# EAGLE board LocoNet pca9685 (EAGLE 7.5.0)
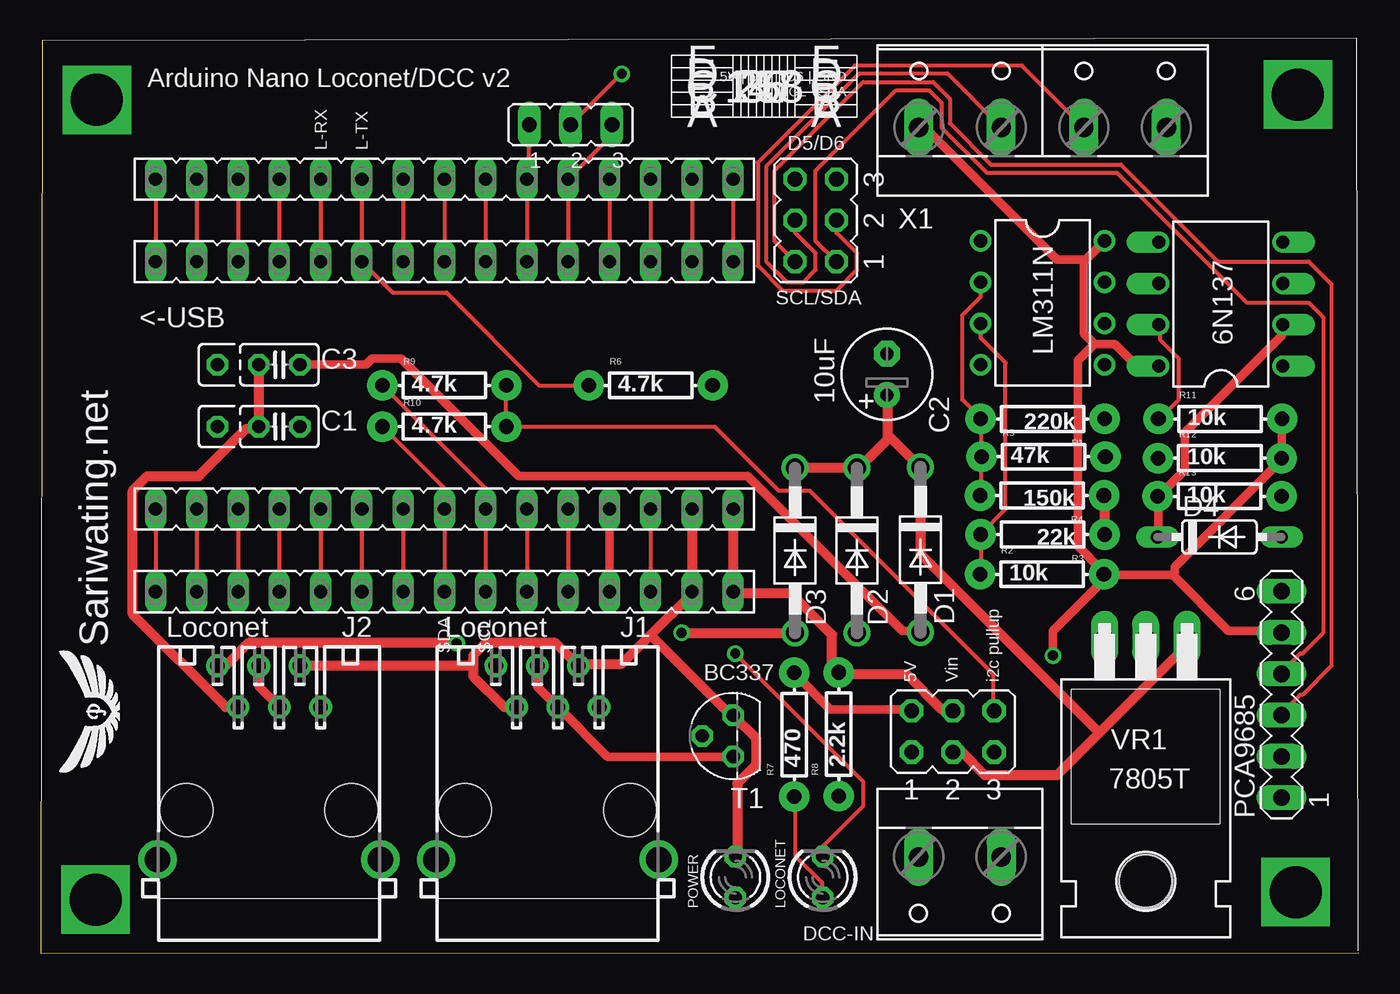
[diagram p0: board, top side]
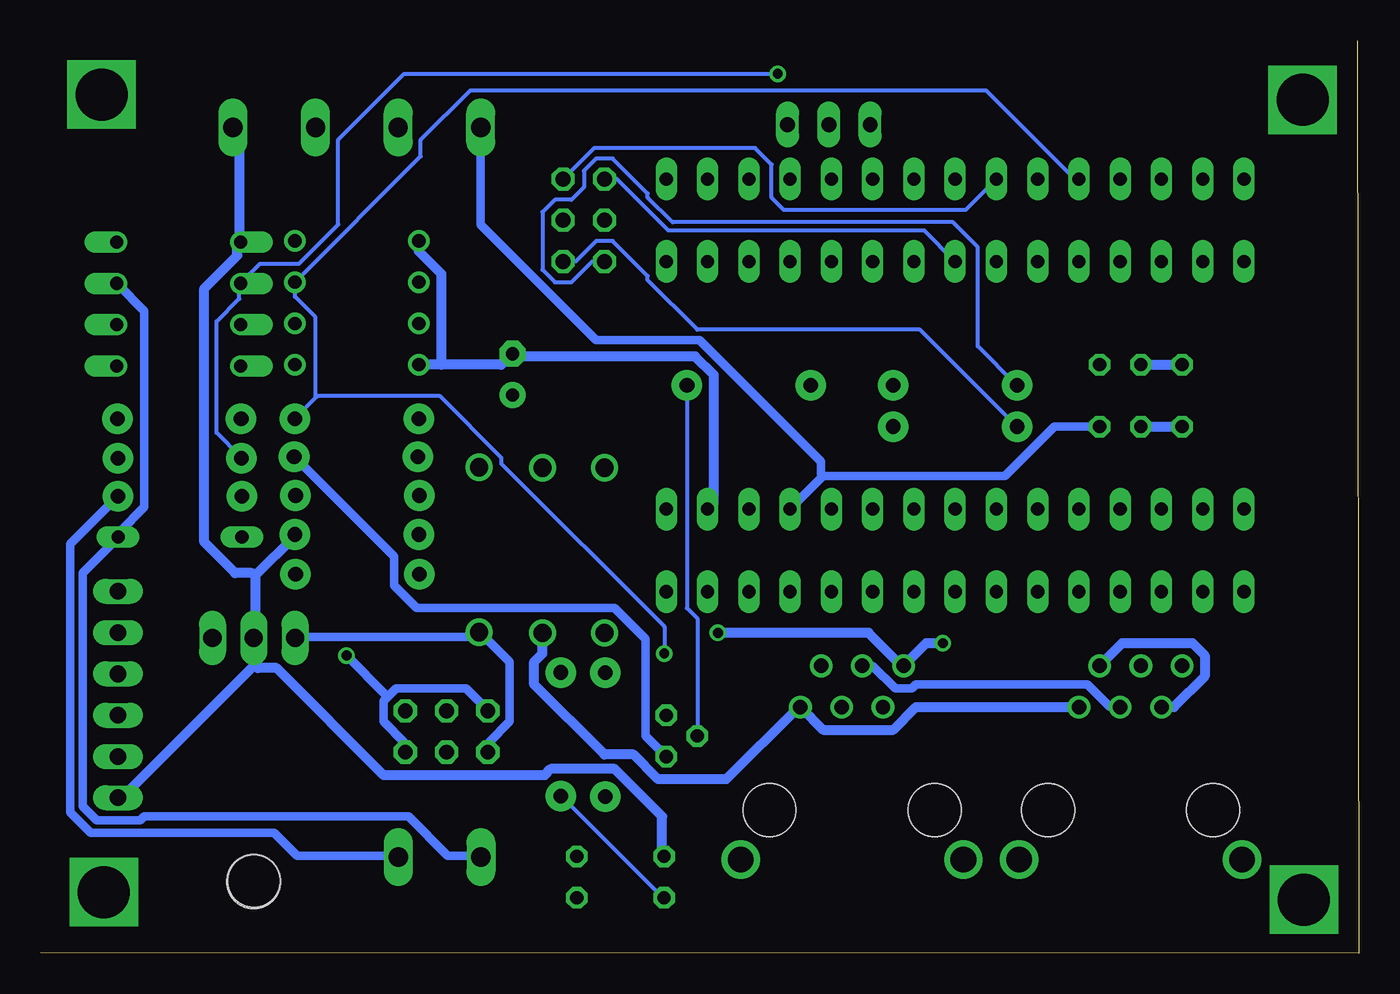
[diagram p1: board, bottom side, seen from below]

Size 81.15 x 56.19 mm. Coordinates in mm from the lower left corner, seen from the top.
Outline: 81.15,0.01 0,0 0.09,56.19
Copper layers (1*16): Top 0.035mm / dielectric 1.5mm / Bottom 0.035mm
Design rules "default *": minimum track width 10mil, minimum drill 24mil, track to track 10mil, track to pad 14mil, pad to pad 14mil, via to via 14mil, smd to smd 8mil, copper to edge 40mil, drill to drill 8mil, minimum pad ring 10mil, minimum via ring 8mil, stop-mask expansion 4mil, vias tented up to drill 0mil, thermal gap 10mil
Net classes: 0 default: width 0.254 mm; 1 ground: width 0.61 mm; 2 5v: width 0.508 mm; 3 Vin: width 0.61 mm; 4 Loconet: width 0.508 mm; 5 DCC: width 0.508 mm
Holes 3.2 mm at 68.02,4.45

## Footprints (pad centres in the part's own frame; a part is rotated, then mirrored left to right if it is on the bottom)
C025_050-025X075 = drill 0.813 octagon: 1 -1.27,0; 2 1.27,0; 3 3.81,0
E2,5-6 = drill 0.813 pad 1.6: + -1.27,0 | drill 0.813 pad 1.6 octagon: - 1.27,0
DO41-10 = drill 1.118: A 5.08,0; C -5.08,0
DO35-7 = drill 0.813 long: A 3.81,0; C -3.81,0
DIL08 = drill 0.813 offset: 1 -3.81,-3.81; 2 -1.27,-3.81; 3 1.27,-3.81; 4 3.81,-3.81; 5 3.81,3.81; 6 1.27,3.81; 7 -1.27,3.81; 8 -3.81,3.81
W237-132 = drill 1.194 long: 1 -2.54,-0.635; 2 2.54,-0.635
555140-1 = drill 0.889: 1 -3.175,8.89; 2 -1.905,6.35; 3 -0.635,8.89; 4 0.635,6.35; 5 1.905,8.89; 6 3.175,6.35 | drill 1.575 pad 2.184: G1 -6.858,-3.048; G2 6.858,-3.048 | hole 3.251: -5.08,0; 5.08,0
JP3Q = drill 0.914 octagon: 1 -2.54,-1.27; 2 -2.54,1.27; 3 0,-1.27; 4 0,1.27; 5 2.54,-1.27; 6 2.54,1.27
JP2 = drill 0.914 long: 1 -2.54,0; 2 0,0; 3 2.54,0
LED3MM = drill 0.813 octagon: A -1.27,0; K 1.27,0
MA06-1 = drill 1.016 long: 1 -6.35,0; 2 -3.81,0; 3 -1.27,0; 4 1.27,0; 5 3.81,0; 6 6.35,0
AXIAL-0.3 = drill 0.9 pad 1.88: P$1 -3.81,0; P$2 3.81,0
FE15 = drill 0.813 long: 1 -17.78,0; 2 -15.24,0; 3 -12.7,0; 4 -10.16,0; 5 -7.62,0; 6 -5.08,0; 7 -2.54,0; 8 0,0; 9 2.54,0; 10 5.08,0; 11 7.62,0; 12 10.16,0; 13 12.7,0; 14 15.24,0; 15 17.78,0
TO92 = drill 0.813 octagon: 1 1.27,0; 2 0,1.905; 3 -1.27,0
DIL08' = drill 0.813 pad 1.27: 1 -3.81,-3.81; 2 -1.27,-3.81; 3 1.27,-3.81; 4 3.81,-3.81; 5 3.81,3.81; 6 1.27,3.81; 7 -1.27,3.81; 8 -3.81,3.81
TO220H = drill 1.118 long: 1 -2.54,-10.16; 2 0,-10.16; 3 2.54,-10.16 | hole 3.302: 0,4.826
W237-4P = drill 1.194 long: 1 -7.62,-0.635; 2 -2.54,-0.635; 3 2.54,-0.635; 4 7.62,-0.635

## Placement (x,y rotation side)
C1  100nF  [C025_050-025X075]  14.69,32.42 180 top
C2  10uF  [E2,5-6]  52.1,35.64 90 top
C3  100nF  [C025_050-025X075]  14.69,36.23 180 top
D1  1N4003  [DO41-10]  54.17,24.84 270 top
D2  1N4003  [DO41-10]  50.25,24.8 270 top
D3  1N4003  [DO41-10]  46.44,24.8 270 top
D4  1N4148DO35-7  [DO35-7]  72.57,25.63 0 top
DCC  6N137  [DIL08]  72.66,39.97 90 top
DCC-IN  [W237-132]  56.59,5.3 180 top
J1  Loconet  [555140-1]  31.2,8.8 0 top
J2  Loconet  [555140-1]  14.06,8.8 0 top
JP1  [JP3Q]  56.16,13.65 0 top
JP2  DCC D3/D2  [JP2]  32.63,51.02 0 top
LOCONET  RED  [LED3MM]  48.15,4.69 90 top
PCA9685  [MA06-1]  76.39,15.93 90 top
POWER  GREEN  [LED3MM]  42.77,4.69 90 top
R1  220k  [AXIAL-0.3]  61.68,32.89 180 top
R2  10k  [AXIAL-0.3]  61.65,23.33 0 top
R3  22k  [AXIAL-0.3]  61.68,25.78 180 top
R4  150k  [AXIAL-0.3]  61.65,28.18 180 top
R5  47k  [AXIAL-0.3]  61.73,30.57 0 top
R6  4.7k  [AXIAL-0.3]  37.55,34.96 0 top
R7  470  [AXIAL-0.3]  46.39,13.46 90 top
R8  2.2k  [AXIAL-0.3]  49.14,13.47 90 top
R9  4.7k  [AXIAL-0.3]  24.85,34.96 0 top
R10  4.7k  [AXIAL-0.3]  24.85,32.42 0 top
R11  10k  [AXIAL-0.3]  72.62,32.89 0 top
R12  10k  [AXIAL-0.3]  72.59,30.48 0 top
R13  10k  [AXIAL-0.3]  72.58,28.13 0 top
SCL/SDA  [JP3Q]  47.71,45.12 90 top
SDA  [FE15]  24.85,22.26 180 top
SV1  [FE15]  24.85,47.66 180 top
SV2  [FE15]  24.85,42.58 180 top
SV3  [FE15]  24.85,27.34 180 top
T1  BC337  [TO92]  42.63,13.37 90 top
U1  LM311N  [DIL08']  61.68,40.04 270 top
VR1  7805T  [TO220H]  68.03,9.25 180 top
X1  [W237-4P]  61.68,51.47 0 top

## Library data of the parts
C1-C3 = rcl
D1-D4 = diode
DCC = optocoupler; MPN: 6N137; OC_FARNELL: 1328376; OC_NEWARK: 52M1895
DCC-IN X1 = con-wago-508; OC_FARNELL: unknown; OC_NEWARK: unknown
J1 J2 = con-amp
JP1 JP2 SCL/SDA = jumper
LOCONET POWER = led
PCA9685 = con-lstb; OC_FARNELL: unknown; OC_NEWARK: unknown
R1-R13 = SparkFun-Resistors
SDA SV1-SV3 = con-lsta; OC_FARNELL: unknown; OC_NEWARK: unknown
T1 = transistor
U1 VR1 = linear

## Nets
+5V [5v]: C1.1 DCC.8 JP1.2 JP1.5 PCA9685.5 R2.P$2 R7.P$2 R11.P$2 R12.P$2 SDA.4 SV3.4 U1.8 X1.1
ARDUINO-DCC: DCC.6 JP2.2 R12.P$1
GND [ground]: C1.2 C2.- C3.2 DCC.5 J1.2 J1.5 J2.2 J2.5 PCA9685.1 POWER.K R3.P$1 R4.P$1 SDA.2 SV3.2 T1.1 U1.1 U1.4 VR1.2 X1.4
L-RX: LOCONET.K R1.P$1 SV1.11 SV2.11 U1.7
L-TX: R6.P$1 SV1.10 SV2.10
N$1 [Vin]: D3.A J1.1 J2.1
N$2 [Vin]: D2.A J1.6 J2.6
N$3: JP1.6 R9.P$2 R10.P$2
N$4 [5v]: C3.1 D1.A JP1.1 VR1.3
N$5: POWER.A R8.P$1
N$6 [Vin]: C2.+ D1.C D2.C D3.C JP1.3 VR1.1
N$7: LOCONET.A R7.P$1
N$8: R6.P$2 T1.2
N$9 [Loconet]: J1.3 J1.4 J2.3 J2.4 R5.P$2 T1.3
N$10: R1.P$2 R4.P$2 R5.P$1 U1.2
N$11: R2.P$1 R3.P$2 U1.3
N$14: SDA.3 SV3.3
N$16: SDA.5 SV3.5
N$17: SDA.6 SV3.6
N$18: SCL/SDA.4 X1.2
N$20: SDA.9 SV3.9
N$21: SDA.10 SV3.10
N$22: SDA.11 SV3.11
N$23: SDA.12 SV3.12
N$24: SDA.13 SV3.13
N$25: SDA.14 SV3.14
N$26: SDA.15 SV3.15
N$27: SV1.1 SV2.1
N$28: SV1.2 SV2.2
N$29: SV1.3 SV2.3
N$30: SV1.4 SV2.4
N$33: SV1.7 SV2.7
N$36: SCL/SDA.3 X1.3
N$37 [DCC]: D4.C DCC.2 R13.P$1
N$38: SV1.12 SV2.12
N$39: SV1.13 SV2.13
N$40: SV1.14 SV2.14
N$41: SV1.15 SV2.15
N$42 [DCC]: D4.A DCC-IN.2 DCC.3
N$43: DCC.7 R11.P$1
N$45 [DCC]: DCC-IN.1 R13.P$2
PIN2: JP2.3 SV1.5 SV2.5
PIN3: JP2.1 SV1.6 SV2.6
PIN5: SCL/SDA.6 SV1.8 SV2.8
PIN6: SCL/SDA.5 SV1.9 SV2.9
SCL: PCA9685.3 R9.P$1 SCL/SDA.2 SDA.7 SV3.7
SDA: PCA9685.4 R10.P$1 SCL/SDA.1 SDA.8 SV3.8
V+ [Vin]: JP1.4 R8.P$2 SDA.1 SV3.1

## Tracks (layer width: path | path; a pad name or v marks a point on that pad's centre or on a via)
+5V  (via drill 0.61)
  Top 0.508: JP1.2 53.56,15.02 48.6,15.02 46.44,17.18 R7.P$2 | R11.P$2 76.42,32.8 76.42,30.52 R12.P$2 76.29,30.26 69.81,23.79 69.81,23.41 69.68,23.28 | 69.68,23.28 73.11,19.85 76.29,19.85 PCA9685.5 | 69.68,23.28 65.49,23.28 R2.P$2 | v62.32,18.33 62.32,19.85 65.49,23.03 R2.P$2 | SV3.4 SDA.4 | 64.86,37.5 66.13,37.5 67.4,36.23 68.8,36.23 DCC.8 | 64.86,37.5 64.22,38.14 64.22,42.58 | U1.8 64.22,42.58 | X1.1 54.44,50.84 62.57,42.71 64.1,42.71 64.22,42.58 | R2.P$2 65.37,23.53 63.84,25.06 63.84,36.49 64.73,37.38 64.86,37.5
  Bottom 0.508: 59.78,15.79 59.27,16.29 54.95,16.29 53.68,15.02 JP1.2 | 59.78,15.79 60.03,15.53 60.03,14.26 58.76,12.99 58.76,12.48 JP1.5 | v62.32,18.33 59.91,15.91 59.78,15.79 | C1.1 18.76,32.42 21.81,29.38 32.98,29.38 | SV3.4 32.98,29.38 | X1.1 54.06,44.87 46.95,37.76 40.6,37.76 33.11,30.26 33.11,29.5 32.98,29.38
ARDUINO-DCC  (via drill 0.61)
  Top 0.254: v35.78,54.14 32.73,51.09 JP2.2
  Bottom 0.254: R12.P$1 68.8,30.52 70.32,32.04 70.32,38.9 68.92,40.3 68.92,41.19 DCC.6 68.8,41.31 67.65,42.46 65.24,42.46 62.83,44.87 62.83,50.08 58.76,54.14 v35.78,54.14
GND
  Top 0.61: R3.P$1 65.49,25.82 65.49,28.11 R4.P$1 | C3.2 C1.2 13.17,32.3 12.66,32.3 9.74,29.38 6.57,29.38 5.68,28.49 5.68,20.87 11.39,15.15 J2.2 | POWER.K 42.89,6.01 42.89,10.45 44.03,11.6 44.03,13.25 T1.1 42.38,14.77 37.68,19.47 37.55,19.6 | SV3.2 SDA.2 39.97,22.01 37.55,19.6 | J1.2 28.54,15.15 26.63,17.06 26.63,17.69 | 26.63,17.69 26.63,18.33 27.39,19.09 31.71,19.09 J1.5 33.36,17.82 35.78,17.82 37.55,19.6 | J2.5 26.38,17.69 26.63,17.69
  Bottom 0.61: X1.4 68.92,50.46 68.92,43.85 DCC.5 69.05,43.6 69.05,42.96 71.08,40.93 71.08,25.31 69.18,23.41 68.16,23.41 67.91,23.28 | 68.03,17.69 76.03,9.69 76.29,9.69 PCA9685.1 | 68.03,17.69 68.03,19.34 VR1.2 67.91,19.6 67.91,23.28 | 67.91,23.28 65.49,25.69 R3.P$1 | J2.2 11.39,15.15 9.49,17.06 9.49,18.33 10.25,19.09 14.57,19.09 J2.5 | 56.48,36.23 52.79,36.23 52.16,36.87 C2.- 51.9,36.74 40.86,36.74 39.71,35.6 39.71,27.72 SV3.2 | 56.48,36.23 U1.4 | U1.1 57.87,43.22 56.48,41.82 56.48,36.49 56.48,36.23 | 68.03,17.69 67.78,17.56 66.64,17.56 60.03,10.96 50.13,10.96 49.75,11.34 45.81,11.34 42.89,8.42 42.89,6.01 POWER.K
L-RX  (via drill 0.61)
  Top 0.254: SV1.11 SV2.11 | v42.76,18.45 50.63,10.58 50.63,9.06 48.22,6.64 48.22,6.01 LOCONET.K
  Bottom 0.254: v42.76,18.45 42.76,20.1 52.79,30.14 52.79,30.52 56.6,34.33 64.1,34.33 64.16,34.26 | 64.16,34.26 65.49,32.93 R1.P$1 | 64.16,34.26 64.22,34.33 64.22,39.15 65.49,40.42 U1.7 57.75,49.06 57.75,50.08 54.7,53.12 22.95,53.12 17.49,47.66 SV1.11
L-TX
  Top 0.254: SV1.10 SV2.10 21.68,40.68 24.98,40.68 30.7,34.96 R6.P$1
N$1  (via drill 0.61)
  Top 0.61: J2.1 11.39,17.69 12.79,19.09 v25.62,19.09 | v39.46,19.72 D3.A
  Bottom 0.61: v25.62,19.09 26.63,19.09 J1.1 28.28,17.82 30.19,19.72 v39.46,19.72
N$2
  Bottom 0.61: J2.6 27.27,15.15 28.66,13.75 32.98,13.75 J1.6 34.63,15.02 38.95,10.71 43.14,10.71 44.67,12.23 46.44,12.23 50.76,16.55 50.76,17.95 50.25,18.45 D2.A
N$3
  Top 0.254: JP1.6 58.64,15.02 58.64,17.18 47.33,28.49 45.43,28.49 41.49,32.42 R10.P$2 R9.P$2
N$4
  Top 0.508: C3.1 20.03,36.23 20.41,36.61 22.19,36.61 29.43,29.38 43.52,29.38 53.05,19.85 54.06,19.85 D1.A
  Bottom 0.508: JP1.1 53.56,12.48 53.56,12.99 52.29,14.26 52.29,17.95 54.06,19.72 D1.A 54.32,19.6 54.44,19.47 65.49,19.47 VR1.3
N$5
  Bottom 0.254: POWER.A 42.89,3.47 49.11,9.69 R8.P$1
N$6
  Top 0.61: D3.C D2.C 50.51,30.01 52.16,31.66 52.16,31.92 | 52.16,31.92 52.16,34.33 C2.+ | 52.16,31.92 54.06,30.01 D1.C 54.19,29.63 54.19,24.55 64.99,13.75 65.18,13.56 | 65.18,13.56 70.57,18.96 70.57,19.34 VR1.1 | 65.18,13.56 62.57,10.96 58.13,10.96 56.73,12.36 56.22,12.36 JP1.3
N$7
  Top 0.254: LOCONET.A 48.09,3.47 48.09,4.36 46.44,6.01 46.44,9.56 R7.P$1
N$8
  Bottom 0.254: T1.2 40.73,20.61 41.36,21.25 R6.P$2
N$9
  Top 0.508: J2.3 13.42,16.42 J2.4 | T1.3 34.89,12.1 J1.4 31.71,15.28 30.57,16.42 J1.3
  Bottom 0.508: T1.3 43.9,13.37 43.9,19.34 45.81,21.25 58,21.25 59.4,22.64 59.4,24.42 65.49,30.52 R5.P$2 | J2.4 15.33,15.15 16.73,16.55 27.27,16.55 27.52,16.29 28.54,16.29 29.93,17.69 J1.3
N$10
  Top 0.254: R4.P$2 57.87,28.23 57.87,30.52 R5.P$1 57.87,30.65 57.87,32.8 R1.P$2 57.87,32.93 56.73,34.07 56.73,39.28 57.87,40.42 U1.2
N$11
  Top 0.254: U1.3 57.87,37.88 59.4,36.36 59.4,27.34 57.87,25.82 R3.P$2 57.87,25.69 57.87,23.41 R2.P$1
N$12  (via drill 3.2 pad 3.81)
  other vias: 77.25,3.76
N$13  (via drill 3.2 pad 3.81)
  other vias: 3.47,52.54
N$14
  Top 0.254: SV3.3 SDA.3
N$15  (via drill 3.2 pad 3.81)
  other vias: 77.41,52.86
N$16
  Top 0.254: SV3.5 SDA.5
N$17
  Top 0.254: SV3.6 SDA.6
N$18
  Top 0.254: SCL/SDA.4 46.44,44.36 47.71,43.09 47.71,42.08 46.95,41.31 45.94,41.31 44.67,42.58 44.67,48.43 50.38,54.14 55.84,54.14 X1.2
N$20
  Top 0.254: SV3.9 SDA.9
N$21
  Top 0.254: SV3.10 SDA.10
N$22
  Top 0.254: SV3.11 SDA.11
N$23
  Top 0.254: SV3.12 SDA.12
N$24
  Top 0.254: SV3.13 SDA.13
N$25
  Top 0.254: SV3.14 SDA.14
N$26
  Top 0.254: SV3.15 SDA.15
N$27
  Top 0.254: SV1.1 SV2.1
N$28
  Top 0.254: SV1.2 SV2.2
N$29
  Top 0.254: SV1.3 SV2.3
N$30
  Top 0.254: SV1.4 SV2.4
N$33
  Top 0.254: SV1.7 SV2.7
N$36
  Top 0.254: SCL/SDA.3 48.98,44.36 50.25,43.09 50.25,42.08 48.98,40.81 45.68,40.81 44.16,42.33 44.16,48.68 50.13,54.65 60.41,54.65 X1.3
N$37
  Top 0.508: D4.C 68.8,25.69 68.8,28.11 R13.P$1 68.92,28.23 70.45,29.76 70.45,32.04 76.42,38.01 76.42,38.65 DCC.2
N$38
  Top 0.254: SV1.12 SV2.12
N$39
  Top 0.254: SV1.13 SV2.13
N$40
  Top 0.254: SV1.14 SV2.14
N$41
  Top 0.254: SV1.15 SV2.15
N$42
  Bottom 0.508: DCC.3 76.42,41.19 74.76,39.54 74.76,27.47 76.29,25.95 76.29,25.69 D4.A 76.54,25.44 78.57,23.41 78.57,9.06 77.69,8.17 75.02,8.17 74.76,8.42 58.51,8.42 56.1,6.01 54.06,6.01 DCC-IN.2
N$43
  Top 0.254: DCC.7 68.92,38.65 68.92,37.76 70.07,36.61 70.07,34.07 68.92,32.93 R11.P$1
N$45
  Bottom 0.508: DCC-IN.1 59.14,6.01 65.37,6.01 66.76,7.4 78.07,7.4 79.34,8.67 79.34,25.18 76.42,28.11 R13.P$2
N$177  (via drill 3.2 pad 3.81)
  other vias: 3.38,3.3
PIN2
  Top 0.254: SV2.5 SV1.5 35.14,50.33 35.14,50.97 JP2.3
PIN3
  Top 0.254: SV2.6 SV1.6 30.06,47.79 30.06,50.97 JP2.1
PIN5
  Top 0.254: SV1.8 SV2.8
  Bottom 0.254: SCL/SDA.6 45.68,47.66 42.51,44.49 26.76,44.49 SV2.8
PIN6
  Top 0.254: SV1.9 SV2.9
  Bottom 0.254: SCL/SDA.5 47.08,49.57 37.17,49.57 36.16,48.55 36.16,46.52 35.39,45.76 24.22,45.76 SV1.9
SCL
  Top 0.254: SDA.7 SV3.7 27.39,28.61 R9.P$1 | SCL/SDA.2 45.17,43.85 45.17,48.17 50.63,53.63 54.95,53.63 55.97,52.62 55.97,51.09 58.51,48.55 66.51,48.55 72.48,42.58 78.07,42.58 79.46,41.19 79.46,17.69 77.69,15.91 77.56,15.91 76.42,14.77 PCA9685.3
  Bottom 0.254: SCL/SDA.2 47.21,42.58 48.48,41.31 49.49,41.31 50.25,42.08 50.25,45.63 49.49,46.39 48.48,46.39 47.71,47.16 47.71,48.17 46.95,48.93 45.94,48.93 43.78,46.77 43.78,46.52 42.25,45 24.98,45 23.46,43.47 23.46,37.38 R9.P$1
SDA
  Top 0.254: SDA.8 SV3.8 24.85,28.61 R10.P$1 | SCL/SDA.1 47.71,43.85 47.71,48.17 52.67,53.12 54.7,53.12 55.46,52.36 55.46,50.84 58.25,48.04 66.26,48.04 74.26,40.04 78.07,40.04 78.96,39.15 78.96,19.72 77.69,18.45 77.56,18.45 76.42,17.31 PCA9685.4
  Bottom 0.254: SCL/SDA.1 48.22,42.58 46.95,43.85 45.94,43.85 43.78,41.69 43.78,41.44 40.73,38.39 27.01,38.39 R10.P$1
V+
  Top 0.61: SV3.1 SDA.1 42.89,22.14 46.19,22.14 48.73,19.6 48.73,17.95 49.11,17.56 R8.P$2 49.24,17.18 53.3,17.18 55.46,15.02 56.1,15.02 JP1.4

## Text on the board
tNames: Arduino Nano Loconet/DCC v2 | 5V | D5 | D6 | GND / SCL SDA | D5/D6 | L-RX | L-TX | SCL/SDA | <-USB | Sariwating.net | SDA | SCL | 5V | Vin | i2c pullup